# Altium PCB Copy of Main_board_4.PcbDoc (part 1 of 2)
Units mm, origin at the board's own origin, x right, y up, seen from the top; angles counter-clockwise.
Board outline 130 x 70 mm, 4 copper layers (Top Layer, Int1 (GND), Int2 (PWR), Bottom Layer), stack 1.577 mm thick; 69 components, 62 nets, 244 pads, 36 vias.
Unrouted connection lines stored in the file: 9.
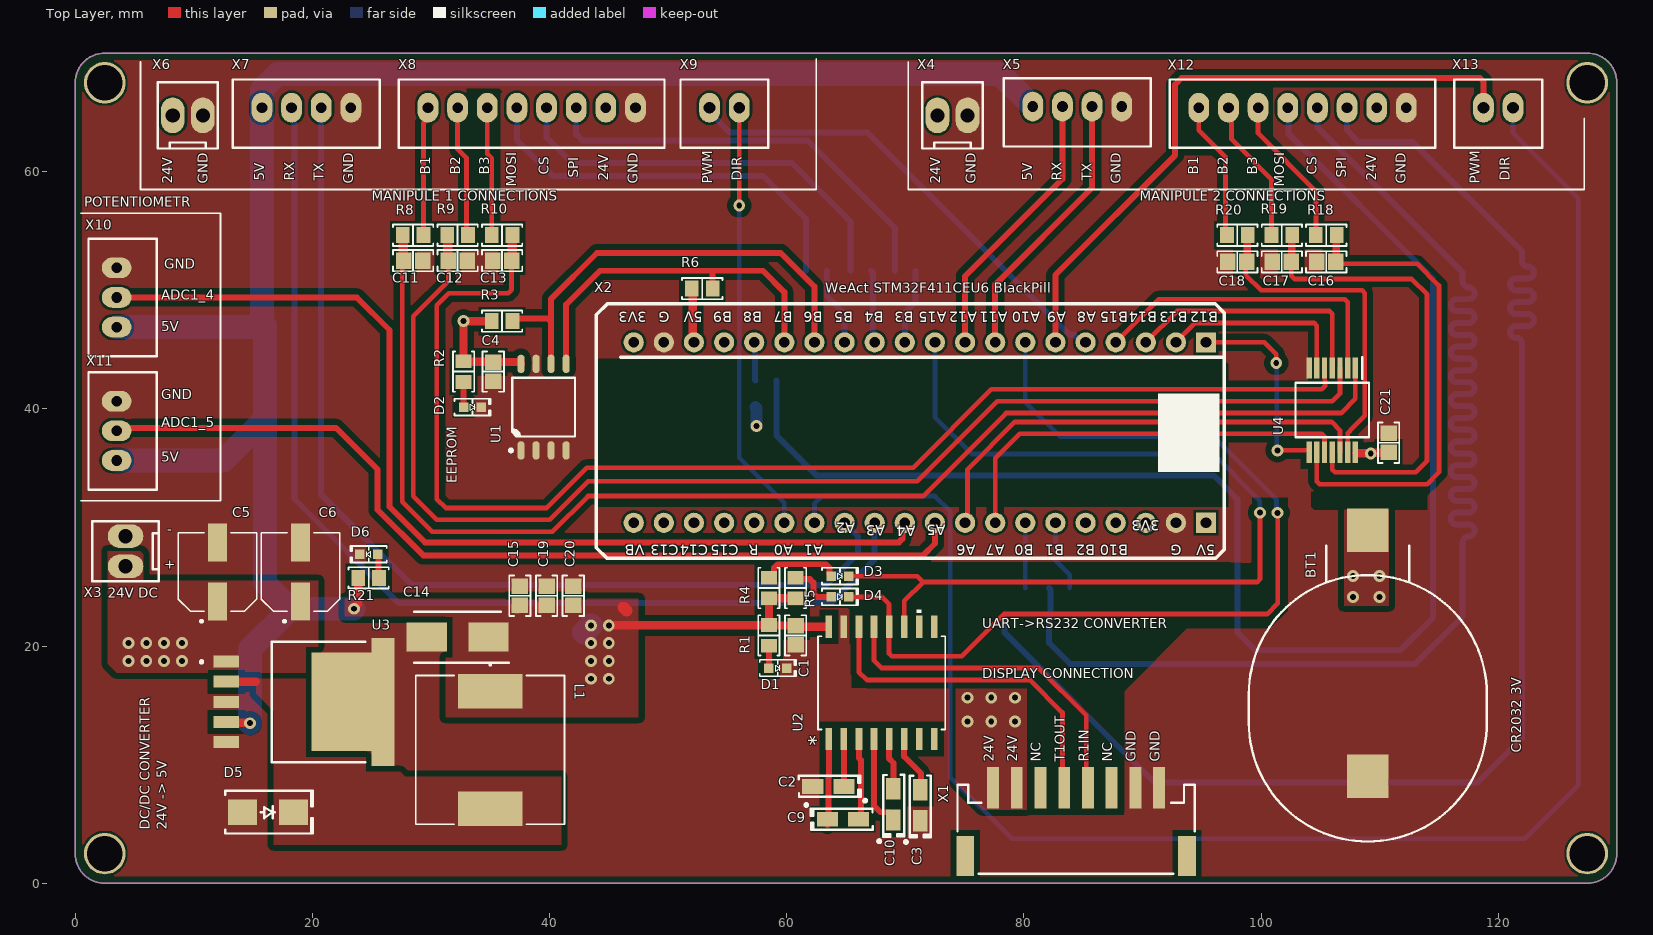
[diagram p0: Top Layer view]
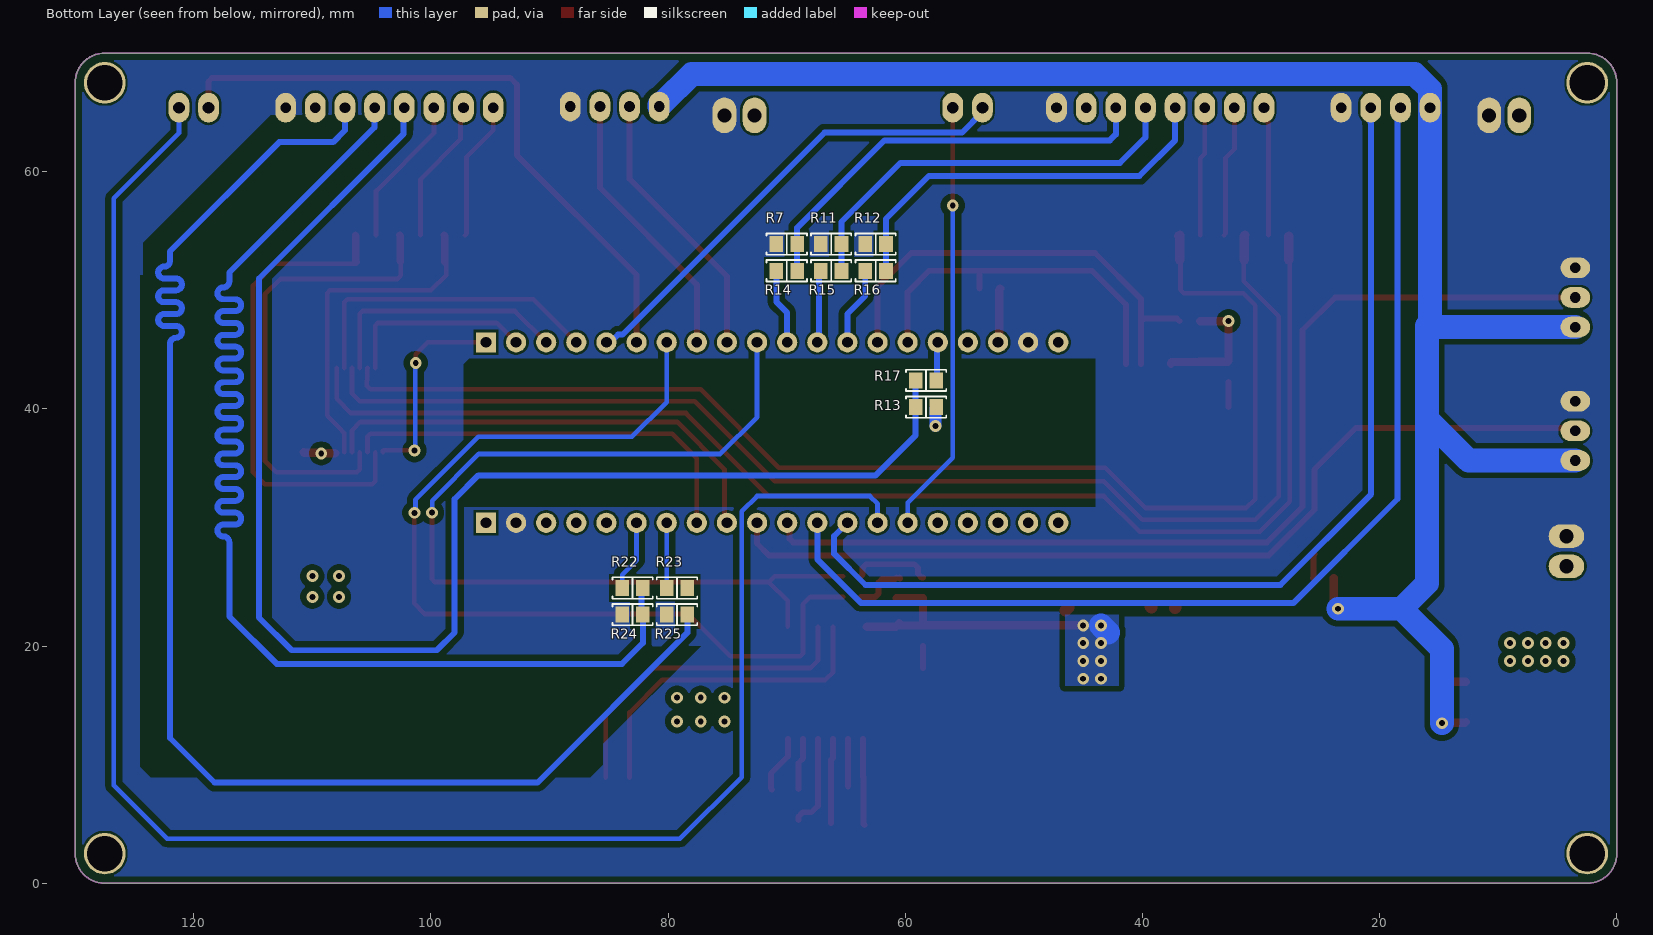
[diagram p1: Bottom Layer view, seen from below]
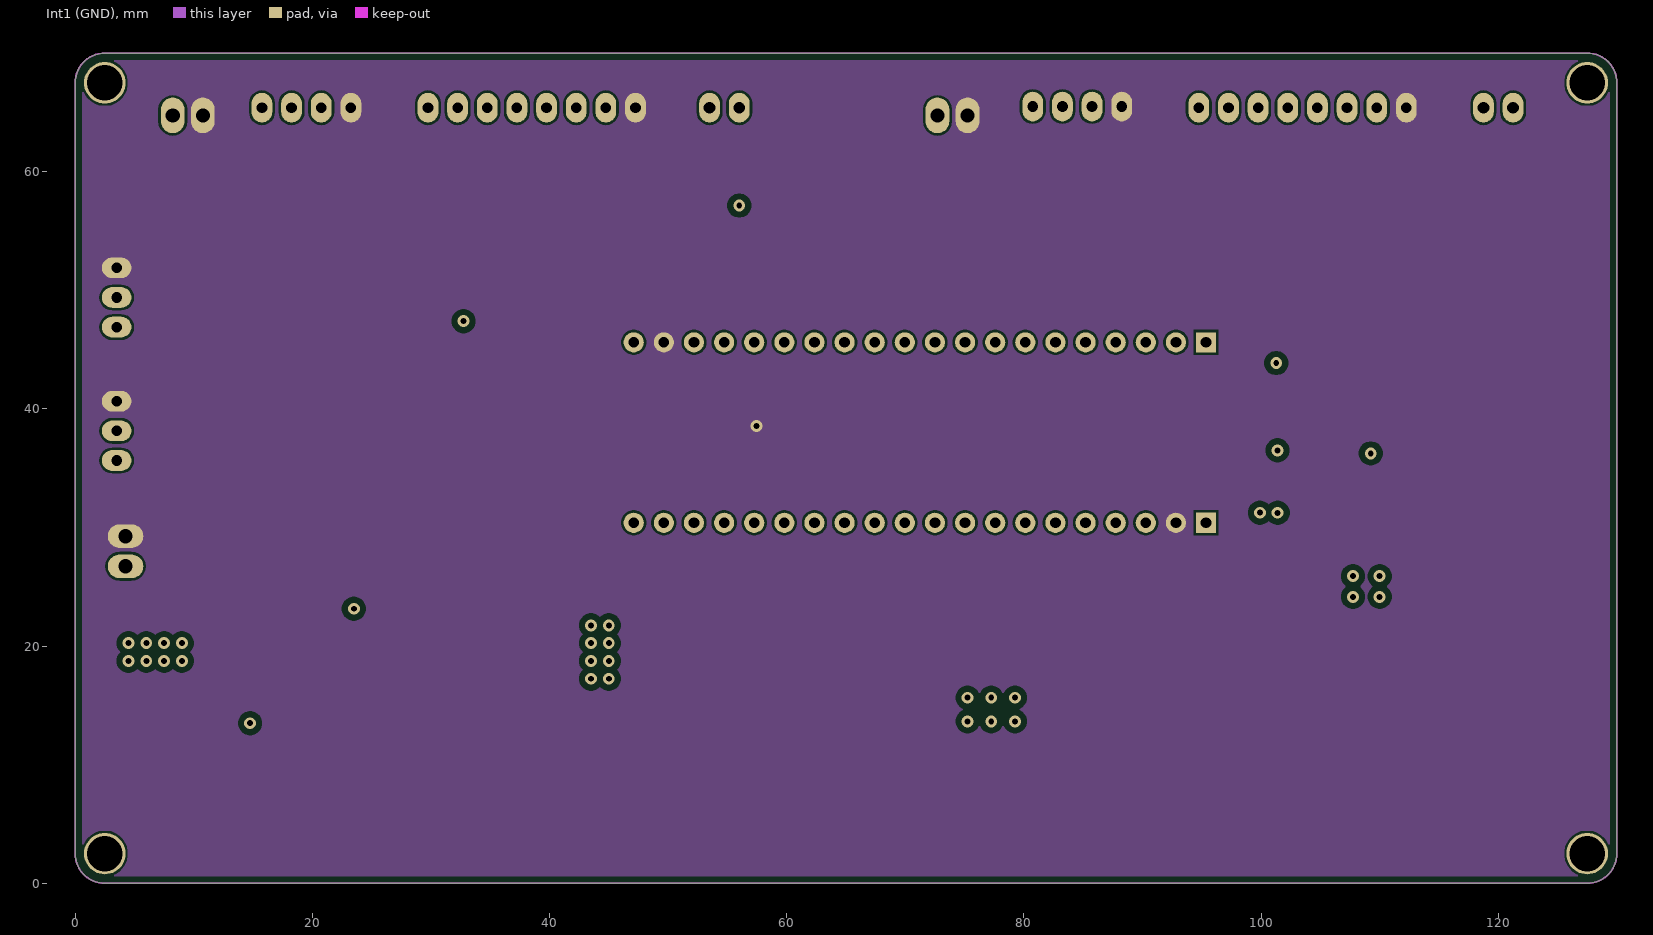
[diagram p2: Int1 (GND)]
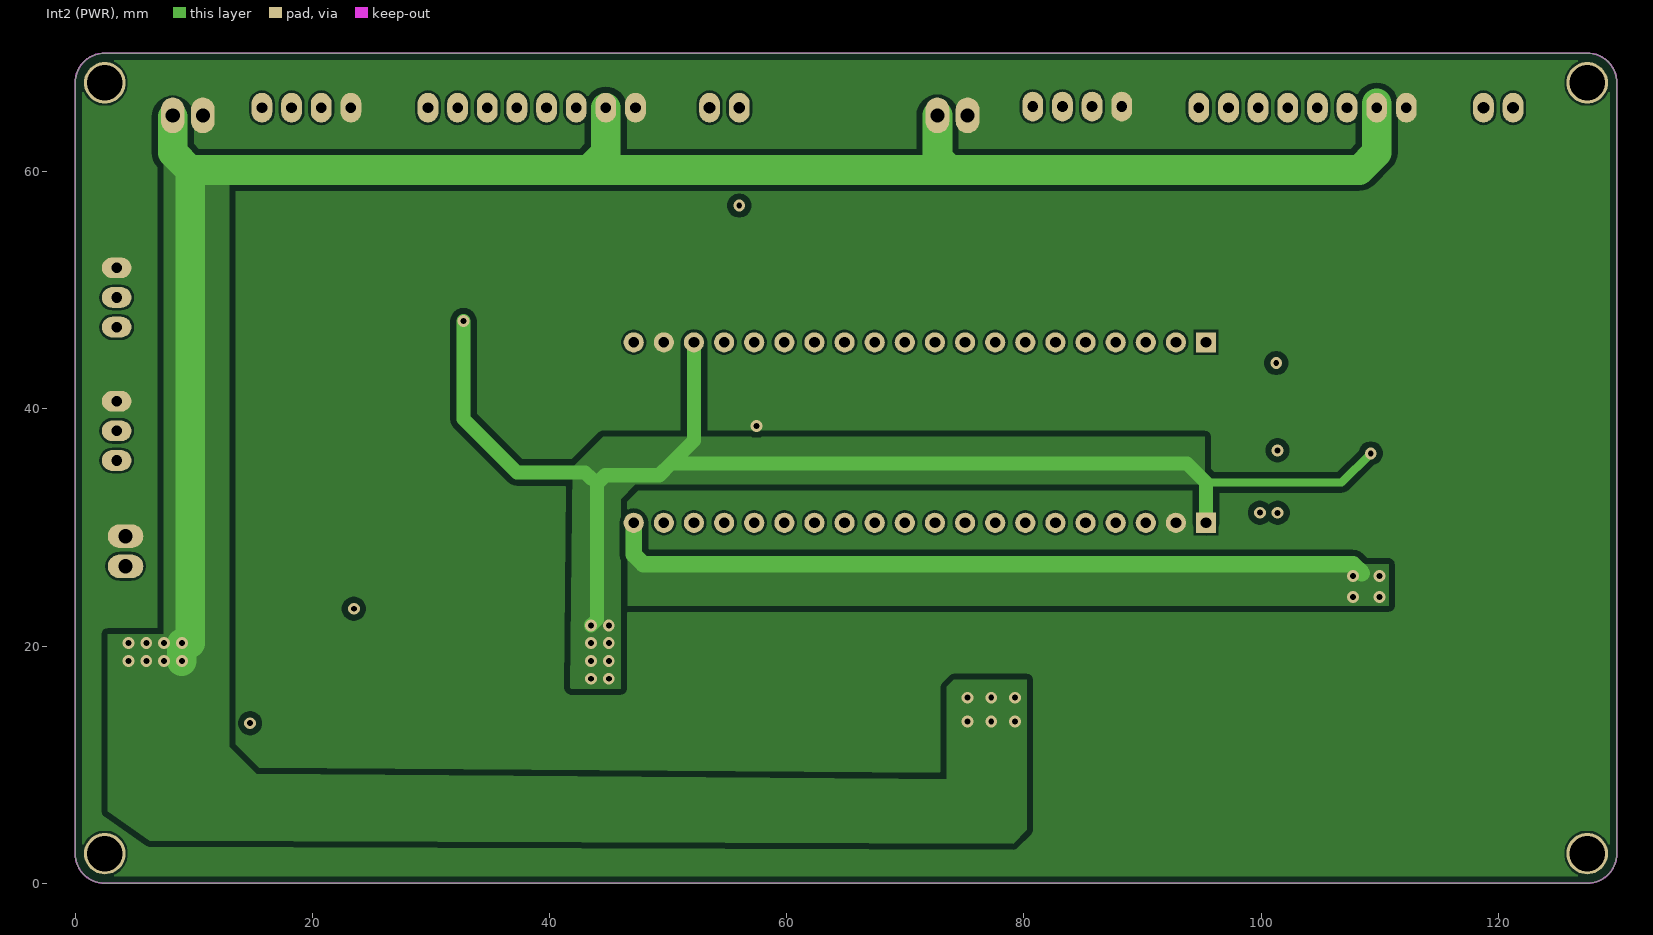
[diagram p3: Int2 (PWR)]

## Layer stack, top to bottom
Top Solder: solder mask 0.0254, SM-002, Dk 4
Top Layer: signal copper 0.035
Dielectric 2: prepreg 0.0711, PP-006, Dk 4.1
Int1 (GND): signal copper 0.035
Dielectric 1: core 1.295, Core-039, Dk 4.8
Int2 (PWR): signal copper 0.035
Dielectric 3: prepreg 0.0711, PP-006, Dk 4.1
Bottom Layer: signal copper 0.035
Bottom Solder: solder mask 0.0254, SM-002, Dk 4

## Board outline
0,2.5 0,67.5 cw(c2.5,67.5) 2.5,70 127.5,70 cw(c127.5,67.5) 130,67.5 130,2.5 cw(c127.5,2.5) 127.5,0 2.5,0 cw(c2.5,2.5)

## Design rules (kind name [scope] priority, off if disabled: settings)
BoardOutlineClearance [All] p1: gap=0.25 ignorepadtopadclearanceinfootprint=FALSE
Clearance Clearance_MultiLayerPad [OnLayer('Multi-Layer') and IsPad] p1: gap=0.2 ignorepadtopadclearanceinfootprint=FALSE except(0: Arc-Hole Track-Hole SMDPad-Hole THPad-Hole Via-Hole Fill-Hole Poly-Hole Region-Hole Text-Hole)
Clearance Clearance_Polygon [InPolygon] p2: gap=0.5 ignorepadtopadclearanceinfootprint=FALSE except(0: Arc-Hole Track-Hole SMDPad-Hole THPad-Hole Via-Hole Fill-Hole Poly-Hole Region-Hole Text-Hole; 0.3: Arc-THPad Arc-Via Arc-Text Track-THPad Track-Via Track-Text SMDPad-THPad SMDPad-Via SMDPad-Text THPad-THPad THPad-Via THPad-Text Via-Via Via-Text Fill-Text Poly-Text Region-Text Text-Text)
Clearance [All] p3: gap=0.1 ignorepadtopadclearanceinfootprint=FALSE except(0: Arc-Hole Track-Hole SMDPad-Hole THPad-Hole Via-Hole Fill-Hole Poly-Hole Region-Hole Text-Hole)
ComponentClearance [All] p1: gap=0.2 collisioncheckmode=3 verticalgap=0.2 showdistances=FALSE
DiffPairsRouting [All] p1: maxlimit=0.5 minlimit=0.1 mostfreqgap=0.19 toplayer_maxgap=0.3 toplayer_minwidth=0.1 toplayer_maxwidth=0.6 toplayer_prefwidth=0.18 midlayer1_prefgap=0.15 midlayer1_minwidth=0.1 midlayer1_maxwidth=0.5 midlayer1_prefwidth=0.15 midlayer2_prefgap=0.15 midlayer2_minwidth=0.1 midlayer2_maxwidth=0.5 midlayer2_prefwidth=0.15 bottomlayer_maxgap=0.3 bottomlayer_minwidth=0.1 bottomlayer_maxwidth=0.6 bottomlayer_prefwidth=0.18 maxuncoupledlength=12.7
Height [All] p1: minheight=0 maxheight=50 prefheight=12.7
HoleSize [All] p1: absolutevalues=TRUE maxlimit=10 minlimit=0.3 maxpercent=80.000 minpercent=20.000
HoleToHoleClearance [All] p1: gap=0.3 allowstackedmicrovias=TRUE
MinimumSolderMaskSliver [All] p1: minsoldermaskwidth=0.05
PlaneClearance [All] p1: clearance=0.5
PlaneConnect [All] p1: planeconnectstyle=Relief reliefexpansion=0.5 reliefentries=4 reliefconductorwidth=0.2 reliefairgap=0.2
PolygonConnect PolygonConnect_PadGND [InNet('GND') and IsPad] p1: connectstyle=Direct reliefconductorwidth=0.2 reliefentries=4 polygonreliefangle="90 Angle" airgapwidth=0.2
PolygonConnect PolygonConnect_Via [IsVia] p2: connectstyle=Direct reliefconductorwidth=0.254 reliefentries=4 polygonreliefangle="90 Angle" airgapwidth=0.254
PolygonConnect [All] p3: connectstyle=Direct reliefconductorwidth=0.2 reliefentries=4 polygonreliefangle="90 Angle" airgapwidth=0.2
RoutingVias [All] p1: holewidth=0.2 width=0.4 viastyle="Through Hole" minholewidth=0.2 minwidth=0.4 maxholewidth=0.5 maxwidth=1.2
SilkToSolderMaskClearance [IsPad] p1: minsilkscreentomaskgap=0.05 clearancetoexposedcopper=TRUE
SolderMaskExpansion [All] p1: expansion=0.075 istentingtop=FALSE
Width [All] p1: maxlimit=10 minlimit=0.1 preferedwidth=0.1
21 further rules are at their usual default settings.

## Classes and differential pairs
component class Main: BT1 C1 C2 C3 C4 C5 C6 C9 C10 C11 C13 C15 C16 C17 C20 C21 D1 D2 D3 D6 L1 R1 R2 R3 R4 R5 R6 R7 R8 R9 R10 R11 R14 R15 R16 R17 R18 R19 R20 R21 R22 R23 R24 R25 U1 U2 U3 U4 X1 X2 X3 X4 X5 X6 X7 X8 X9 X10 X11 X12 X13

## Components (designator, comment, footprint, x,y, rotation, side; value= is the part's Value field where it differs from the comment)
BT1 "1070TR" 1070TR 109,16.65 r270 top
C1 "0.1µF" "CAP 0805_2012" 60.75,20.9 r90 top
C2 "0.47µF" "CAP POL 1206_3216" 63.515,8.165 r180 top
C3 "0.47µF" "CAP POL 1206_3216" 71.25,6.59 r90 top
C4 "0.1µF" "CAP 0805_2012" 35.25,43.15 r90 top
C5 "EEHZA1V470P" CAP_EEHZA1V470P 12,26.25 r90 top value="47 uF 35V"
C6 "EEHZA1V470P" CAP_EEHZA1V470P 19,26.25 r90 top value="47 uF 35V"
C9 "0.1µF" "CAP POL 1206_3216" 64.75,5.4 r0 top
C10 "0.47µF" "CAP POL 1206_3216" 69,6.65 r90 top
C11 "0.1µF" "CAP 0805_2012" 28.5,52.5 r180 top
C12 "0.1µF" "CAP 0805_2012" 32.25,52.5 r180 top
C13 "0.1µF" "CAP 0805_2012" 36,52.5 r0 top
C14 "293D227X9010E2TE3" CAPPM7343X430N 32.25,20.75 r180 top
C15 "10µF" "CAP 0805_2012" 37.5,24.25 r90 top
C16 "0.1µF" "CAP 0805_2012" 105.5,52.4 r0 top
C17 "0.1µF" "CAP 0805_2012" 101.75,52.4 r0 top
C18 "0.1µF" "CAP 0805_2012" 98,52.4 r0 top
C19 "10µF" "CAP 0805_2012" 39.75,24.25 r90 top
C20 "0.47µF" "CAP 0805_2012" 42,24.25 r270 top
C21 "0.1µF" "CAP 0805_2012" 110.75,37.15 r270 top
D1 "Red" "LED 0603_1608 RED" 59.25,18.15 r0 top
D2 "Red" "LED 0603_1608 RED" 33.5,40.15 r0 top
D3 "Red" "LED 0603_1608 RED" 64.5,25.9 r0 top
D4 "Red" "LED 0603_1608 RED" 64.5,24.15 r0 top
D5 "SS26" "DO214AA SMB" 16.25,6 r0 top
D6 "Red" "LED 0603_1608 RED" 24.75,27.75 r180 top
L1 "CDRH127/LDNP-820MC" IND_CDRH127/LDNP-470MC_SUM 35,11.25 r270 top
R1 "1 kOhms" "RES 0805_2012" 58.5,20.9 r90 top
R2 "1 kOhms" "RES 0805_2012" 32.75,43.15 r90 top
R3 "10 kOhms" "RES 0805_2012" 36,47.4 r180 top
R4 "1 kOhms" "RES 0805_2012" 58.5,24.9 r270 top
R5 "1 kOhms" "RES 0805_2012" 60.75,24.9 r270 top
R6 "10 kOhms" "RES 0805_2012" 52.875,50.15 r180 top
R7 "1 kOhms" "RES 0805_2012" 70,53.9 r0 bottom
R8 "10 kOhms" "RES 0805_2012" 28.5,54.65 r0 top
R9 "10 kOhms" "RES 0805_2012" 32.25,54.65 r0 top
R10 "10 kOhms" "RES 0805_2012" 36,54.65 r180 top
R11 "1 kOhms" "RES 0805_2012" 66.25,53.9 r0 bottom
R12 "1 kOhms" "RES 0805_2012" 62.5,53.9 r0 bottom
R13 "1 kOhms" "RES 0805_2012" 58.25,40.15 r180 bottom
R14 "1 kOhms" "RES 0805_2012" 70,51.65 r180 bottom
R15 "1 kOhms" "RES 0805_2012" 66.25,51.65 r180 bottom
R16 "1 kOhms" "RES 0805_2012" 62.5,51.65 r180 bottom
R17 "1 kOhms" "RES 0805_2012" 58.25,42.4 r0 bottom
R18 "10 kOhms" "RES 0805_2012" 105.5,54.65 r180 top
R19 "10 kOhms" "RES 0805_2012" 101.75,54.65 r180 top
R20 "10 kOhms" "RES 0805_2012" 98,54.65 r180 top
R21 "1 kOhms" "RES 0805_2012" 24.75,25.75 r180 top
R22 "1 kOhms" "RES 0805_2012" 83,24.9 r0 bottom
R23 "1 kOhms" "RES 0805_2012" 79.25,24.9 r0 bottom
R24 "1 kOhms" "RES 0805_2012" 83,22.65 r0 bottom
R25 "1 kOhms" "RES 0805_2012" 79.25,22.65 r0 bottom
U1 "AT24C512C-SHD-T" "MICROCHIP SOIC-8 208MIL WIDE" 39.5,40.15 r90 top
U2 "MAX3232CDW" DW16 68,16.9 r90 top
U3 "LM2596SX-5.0_NOPB" KTT0005B 25.211,15.3 r180 top
U4 "SN74HCT14DBR" SOP65P780X200-14N 106,39.9 r270 top
X1 "S8B-PH-SM4-TB(LF)(SN)" "JST S8B-PH-SM4-TB" 84.4,3.8 r180 top
X2 "STM32F411CU6_WeAct" "STM32F4x1CxU6 WeActStudio" 96.882,48.866 r180 top
X3 "0022272021" "MOLEX KK 0022272021" 4.25,28 r90 top
X4 "0022272021" "MOLEX KK 0022272021" 73.98,64.75 r0 top
X5 "B4B-XH-A(LF)(SN)" "JST XH B4B-XH-A" 84.5,65.5 r0 top
X6 "0022272021" "MOLEX KK 0022272021" 9.5,64.75 r0 top
X7 "B4B-XH-A(LF)(SN)" "JST XH B4B-XH-A" 19.5,65.4 r0 top
X8 "B8B-XH-A(LF)(SN)" "JST XH B8B-XH-A" 38.5,65.4 r0 top
X9 "B2B-XH-A(LF)(SN)" "JST XH B2B-XH-A" 54.75,65.4 r0 top
X10 "B3B-XH-A(LF)(SN)" "JST XH B3B-XH-A" 3.5,49.4 r90 top
X11 "B3B-XH-A(LF)(SN)" "JST XH B3B-XH-A" 3.5,38.15 r90 top
X12 "B8B-XH-A(LF)(SN)" "JST XH B8B-XH-A" 103.5,65.4 r0 top
X13 "B2B-XH-A(LF)(SN)" "JST XH B2B-XH-A" 120,65.4 r0 top

## Footprints (in the part's own frame and the unit in brackets; to place one, negate y for a bottom-side part, rotate by r counter-clockwise, add the part's x,y. Pads: shape width x height; smd on the part's side, far side on the other; paste and mask are expansions set on the pad)
1070TR [mm]
  rect 3.65x3.51 smd: 1(-13.13,0) 2(7.62,0)
  silkscreen extent -11.8,-10.03 13.13,10.03
"CAP 0805_2012" [mm] "Chip Capacitor, 2-Leads, Body 2.00x1.20mm, IPC Medium Density"
  rect 1.3x1.4 smd: 1(-0.8,0) 2(0.8,0)
  silkscreen extent -1.7,-0.9 1.7,0.9, body extent -1,-0.64 1,0.64, height 1.26
"CAP POL 1206_3216" [mm] "Molded Capacitor, 2-Leads, Body 3.20x1.6mm, IPC Medium Density"
  rect 1.8x1.23 smd: 1(-1.31,0) 2(1.31,0)
  silkscreen extent -3.22,-0.9 2.5,1.32, body extent -1.72,-0.85 1.71,0.85, height 1.7
CAP_EEHZA1V470P [mm]
  rect 3.2x1.6 smd: 1(-2.5,0) 2(2.5,0)
  silkscreen extent -4.25,-3.3 3.3,3.3, body extent -3.65,-3.3 3.65,3.3, height 5.8
CAPPM7343X430N [mm]
  rect 3.4x2.45 smd: 1(-2.6,0) 2(2.6,0)
  silkscreen extent -4.3,-2.15 3.65,2.15, body extent -3.59,-2.35 3.6,2.35, height 4.12
"DO214AA SMB" [mm] "Molded Diode, 2-Leads, Body 4.31x3.62mm, IPC Medium Density"
  rect 2.45x2.15 smd: 1(-2.15,0) 2(2.15,0)
  silkscreen extent -3.6,-1.8 3.8,1.8, body extent -2.6,-1.8 2.6,1.8, height 2.4
DW16 [mm]
  rect 1.874x0.558 smd paste+0 mask+0: 1(-4.734,4.445) 2(-4.734,3.175) 3(-4.734,1.905) 4(-4.734,0.635) 5(-4.734,-0.635) 6(-4.734,-1.905) 7(-4.734,-3.175) 8(-4.734,-4.445) 9(4.734,-4.445) 10(4.734,-3.175) 11(4.734,-1.905) 12(4.734,-0.635) 13(4.734,0.635) 14(4.734,1.905) 15(4.734,3.175) 16(4.734,4.445)
  silkscreen extent -3.92,-5.37 6.18,5.37, body extent -5.32,-5.25 5.32,5.25, height 2.64
IND_CDRH127/LDNP-470MC_SUM [mil]
  rect 114x213 smd: 1(-195,0) 2(195,0)
  silkscreen extent -285,-247 247,247, body extent -236,-236 236,236, height 315
"JST S8B-PH-SM4-TB" [mm] "JST PH Series 2mm pitch, side entry connector"
  rect 1x3.5 smd: 1(-7,-4.25) 2(-5,-4.25) 3(-3,-4.25) 4(-1,-4.25) 5(1,-4.25) 6(3,-4.25) 7(5,-4.25) 8(7,-4.25)
  rect 1.5x3.4 smd: M(-9.35,1.5) M(9.35,1.5)
  silkscreen extent -10,-4.5 10,3, body extent -9.95,-5.6 9.95,3.01, height 5.6
"JST XH B2B-XH-A" [mm]
  oval 1.75x2.5 hole 1: 1(-1.25,0) 2(1.25,0)
  silkscreen extent -3.7,-3.38 3.7,2.38, body extent -3.7,-3.38 3.7,2.38, height 7
"JST XH B3B-XH-A" [mm]
  oval 1.75x2.5 hole 0.9: 1(-2.5,0) 2(0,0) 3(2.5,0)
  silkscreen extent -4.95,-3.38 4.95,2.38, body extent -4.95,-3.38 4.95,2.38, height 7
"JST XH B4B-XH-A" [mm]
  oval 1.75x2.5 hole 0.9: 1(-3.75,0) 2(-1.25,0) 3(1.25,0) 4(3.75,0)
  silkscreen extent -6.2,-3.38 6.2,2.38, body extent -6.2,-3.38 6.2,2.38, height 7
"JST XH B8B-XH-A" [mm]
  oval 1.75x2.5 hole 0.9: 1(-8.75,0) 2(-6.25,0) 3(-3.75,0) 4(-1.25,0) 5(1.25,0) 6(3.75,0) 7(6.25,0) 8(8.75,0)
  silkscreen extent -11.2,-3.38 11.2,2.38, body extent -11.2,-3.38 11.2,2.38, height 7
KTT0005B [mm]
  rect 2.16x1.02 smd: 1(12.461,-3.4) 2(12.461,-1.7) 3(12.461,0) 4(12.461,1.7) 5(12.461,3.4)
  rect 6.99x8.33 smd: 6(1.786,0)
  rect 1.91x1.235 smd: 7(-0.754,4.782) 8(-0.754,-4.782)
  silkscreen extent 0.76,-5.08 14.68,5.08, body extent -1.11,-5.08 13.24,5.08, height 4.72
"LED 0603_1608 RED" [mm] "Chip Diode, 2-Leads, Body 1.60x0.80mm, IPC Medium Density"
  rect 0.8x0.8 smd: 1(-0.75,0) 2(0.75,0)
  silkscreen extent -1.52,-0.7 1.52,0.7, body extent -0.8,-0.4 0.8,0.4, height 0.53
"MICROCHIP SOIC-8 208MIL WIDE" [mm] "SOIC, 8-Leads, Body 5.28x5.28mm, Pitch 1.27mm, IPC Medium Density"
  oval 1.55x0.6 smd: 1(-3.65,1.905) 2(-3.65,0.635) 3(-3.65,-0.635) 4(-3.65,-1.905) 5(3.65,-1.905) 6(3.65,-0.635) 7(3.65,0.635) 8(3.65,1.905)
  silkscreen extent -3.77,-2.65 2.47,2.88, body extent -4.01,-2.64 4.01,2.64, height 1.5
"MOLEX KK 0022272021" [mm]
  oval 2x3 hole 1.2: 1(-1.27,0) 2(1.27,0)
  silkscreen extent -2.54,-2.79 2.54,2.79, body extent -2.54,-2.9 2.54,2.9, height 11.7
"RES 0805_2012" [mm] "Chip Resistor, 2-Leads, Body 2.00x1.25mm, IPC Medium Density"
  rect 1.15x1.35 smd: 1(-0.875,0) 2(0.875,0)
  silkscreen extent -1.7,-0.9 1.7,0.9, body extent -1,-0.62 1,0.63, height 0.6
SOP65P780X200-14N [mm]
  rect 1.8x0.45 smd: 1(-3.55,1.95) 2(-3.55,1.3) 3(-3.55,0.65) 4(-3.55,0) 5(-3.55,-0.65) 6(-3.55,-1.3) 7(-3.55,-1.95) 8(3.55,-1.95) 9(3.55,-1.3) 10(3.55,-0.65) 11(3.55,0) 12(3.55,0.65) 13(3.55,1.3) 14(3.55,1.95)
  silkscreen extent -4.45,-3.1 2.3,3.1, body extent -3.9,-3.1 3.9,3.1, height 1.9
"STM32F4x1CxU6 WeActStudio" [mm]
  rect 1.7x1.7 hole 0.9: 1(1.522,3.251) 40(1.522,18.466)
  round 1.7 hole 0.9: 2(4.062,3.251) 3(6.602,3.251) 4(9.142,3.251) 5(11.682,3.251) 6(14.222,3.251) 7(16.762,3.251) 8(19.302,3.251) 9(21.842,3.251) 10(24.382,3.251) 11(26.922,3.251) 12(29.462,3.251) 13(32.002,3.251) 14(34.542,3.251) 15(37.082,3.251) 16(39.622,3.251) 17(42.162,3.251) 18(44.702,3.251) 19(47.242,3.251) 20(49.782,3.251) 21(49.782,18.466) 22(47.242,18.466) 23(44.702,18.466) 24(42.162,18.466) 25(39.622,18.466) 26(37.082,18.466) 27(34.542,18.466) 28(32.002,18.466) 29(29.462,18.466) 30(26.922,18.466) 31(24.382,18.466) 32(21.842,18.466) 33(19.302,18.466) 34(16.762,18.466) 35(14.222,18.466) 36(11.682,18.466) 37(9.142,18.466) 38(6.602,18.466) 39(4.062,18.466)
  silkscreen extent 0,0 52.93,21.46, body extent 0,2 51.3,19.72, height 8.5

## Part data
BT1: "Battery", Manufacturer_Name="Keystone Electronics", Mouser Part Number=534-1070TR, Datasheet Link=https://www.keyelco.com/product-pdf.cfm?p=14018, Height=6.22mm, Manufacturer_Part_Number=1070TR, Mouser Price/Stock=https://www.mouser.co.uk/ProductDetail/Keystone-Electronics/1070TR?qs=76dmnhCH%2FMN2NfD64M7eLg%3D%3D
C1 C4 C11 C12 C13 C16 C17 C18 C21: library part C0805C104K9RACAUTO, "SMD AUTO X7R, CERAMIC, 0.1 UF, 1", Device Package="0805 (2012 Metric)", Manufacturer=KEMET, Operating Temperature="-55°C ~ 125°C", Ratings=AEC-Q200, Supplier Part Number 1=399-C0805C104K9RACAUTOCT-ND, Temperature Coefficient=X7R, Tolerance=±10%, Voltage - Rated=6.3V, Applications="Automotive, Bypass, Decoupling", Capacitance=0.1µF, ComponentLink1Description=Datasheet, ComponentLink1URL=https://api.kemet.com/component-edge/download/datasheet/C0805C104K9RACAUTO.pdf, ComponentLink2Description="DigiKey Link", ComponentLink2URL=http://digikey.com/product-detail/en/kemet/C0805C104K9RACAUTO/399-C0805C104K9RACAUTOCT-ND/10232873, LastUpdated="02.09.2020 01:04:08", Lifecycle Status=Active, Minimum Order=1, Mounting Type="Surface Mount, MLCC", Package / Case="0805 (2012 Metric)", Packaging=TapeAndReel, Part Number=C0805C104K9RACAUTO, Part Status=Active, PartId=17729, Price=0.05, Series="SMD Auto X7R", Size / Dimension="0.079\" L x 0.049\" W (2.00mm x 1.25mm)", Supplier 1=DigiKey, Thickness (Max)="0.035\" (0.88mm)"
C2 C3 C10: library part 293D474X9035A2TE3, "CAP TANT 0.47UF 10% 35V 1206", Device Package="1206 (3216 Metric)", ESR (Equivalent Series Resistance)=10Ohm, Manufacturer="Vishay Sprague", Manufacturer Size Code=A, Operating Temperature="-55°C ~ 125°C", Supplier Part Number 1=718-1808-1-ND, Tolerance=±10%, Voltage - Rated=35V, Capacitance=0.47µF, ComponentLink1Description=Datasheet, ComponentLink1URL=http://www.vishay.com/docs/40002/293d.pdf, ComponentLink2Description="DigiKey Link", ComponentLink2URL=http://digikey.com/product-detail/en/vishay-sprague/293D474X9035A2TE3/718-1808-1-ND/2259950, Features="General Purpose", Height - Seated (Max)="0.071\" (1.80mm)", LastUpdated="02.09.2020 01:15:57", Lifecycle Status=Active, Minimum Order=1, Mounting Type="Surface Mount", Package / Case="1206 (3216 Metric)", Packaging=TapeAndReel, Part Number=293D474X9035A2TE3, Part Status=Active, PartId=592, Price=0.12, Series="TANTAMOUNT®, 293D", Size / Dimension="0.126\" L x 0.063\" W (3.20mm x 1.60mm)", Supplier 1=DigiKey, Type=Molded
C5 C6: "CAP ALUM POLY HYB 47UF 35V SMD", Package=None, Availability=Unavailable, MF="{'manufacturer': u'Panasonic Electronic'}", MP=EEHZA1V470P, Price=None
C9: library part 293D104X0035A2TE3, "CAP TANT 0.1UF 20% 35V 1206", Device Package="1206 (3216 Metric)", ESR (Equivalent Series Resistance)=20Ohm, Manufacturer="Vishay Sprague", Manufacturer Size Code=A, Operating Temperature="-55°C ~ 125°C", Supplier Part Number 1=718-293D104X0035A2TE3CT-ND, Tolerance=±20%, Voltage - Rated=35V, Capacitance=0.1µF, ComponentLink1Description=Datasheet, ComponentLink1URL=http://www.vishay.com/docs/40002/293d.pdf, ComponentLink2Description="DigiKey Link", ComponentLink2URL=http://digikey.com/product-detail/en/vishay-sprague/293D104X0035A2TE3/718-293D104X0035A2TE3CT-ND/10506968, Features="General Purpose", Height - Seated (Max)="0.071\" (1.80mm)", LastUpdated="02.09.2020 01:15:53", Lifecycle Status=Active, Minimum Order=1, Mounting Type="Surface Mount", Package / Case="1206 (3216 Metric)", Packaging=TapeAndReel, Part Number=293D104X0035A2TE3, Part Status=Active, PartId=2092, Price=0.09, Series="TANTAMOUNT®, 293D", Size / Dimension="0.126\" L x 0.063\" W (3.20mm x 1.60mm)", Supplier 1=DigiKey, Type=Molded
C14: "Tantalum Capacitors - Solid SMD 220uF 10volts 10% E case Molded", Manufacturer_Name=Vishay, Mouser Part Number="220uF 10v", Datasheet Link=http://www.vishay.com/docs/40002/293d.pdf, Height=4.3mm, Manufacturer_Part_Number=293D227X9010E2TE3
C15 C19: library part GRM21BR61H106KE43L, "0805 (2012MM) X5R (EIA) 50VDC 10", Device Package="0805 (2012 Metric)", Manufacturer="Murata Electronics", Operating Temperature="-55°C ~ 85°C", Supplier Part Number 1=490-18663-1-ND, Temperature Coefficient=X5R, Tolerance=±10%, Voltage - Rated=50V, Applications="General Purpose", Capacitance=10µF, ComponentLink1Description=Datasheet, ComponentLink1URL=https://search.murata.co.jp/Ceramy/image/img/A01X/G101/ENG/GRM21BR61H106KE43-01A.pdf, ComponentLink2Description="DigiKey Link", ComponentLink2URL=http://digikey.com/product-detail/en/murata-electronics/GRM21BR61H106KE43L/490-18663-1-ND/10326328, LastUpdated="02.09.2020 01:04:31", Lifecycle Status=Active, Minimum Order=1, Mounting Type="Surface Mount, MLCC", Package / Case="0805 (2012 Metric)", Packaging=TapeAndReel, Part Number=GRM21BR61H106KE43L, Part Status=Active, PartId=8559, Price=0.10, Series=GRM, Size / Dimension="0.079\" L x 0.049\" W (2.00mm x 1.25mm)", Supplier 1=DigiKey, Thickness (Max)="0.057\" (1.45mm)"
C20: library part GCM21BR71H474KA55L, "CAP CER 0.47UF 50V X7R 0805", Device Package="0805 (2012 Metric)", Manufacturer="Murata Electronics", Operating Temperature="-55°C ~ 125°C", Ratings=AEC-Q200, Supplier Part Number 1=490-4788-1-ND, Temperature Coefficient=X7R, Tolerance=±10%, Voltage - Rated=50V, Applications=Automotive, Capacitance=0.47µF, ComponentLink1Description=Datasheet, ComponentLink1URL=https://www.murata.com/~/media/webrenewal/support/library/catalog/products/capacitor/mlcc/c03e.ashx?la=en-us, ComponentLink2Description="DigiKey Link", ComponentLink2URL=http://digikey.com/product-detail/en/murata-electronics/GCM21BR71H474KA55L/490-4788-1-ND/1641707, LastUpdated="02.09.2020 01:04:31", Lifecycle Status=Active, Minimum Order=1, Mounting Type="Surface Mount, MLCC", Package / Case="0805 (2012 Metric)", Packaging=TapeAndReel, Part Number=GCM21BR71H474KA55L, Part Status=Active, PartId=8527, Price=0.08, Series=GCM, Size / Dimension="0.079\" L x 0.049\" W (2.00mm x 1.25mm)", Supplier 1=DigiKey, Thickness (Max)="0.055\" (1.40mm)"
D1 D2 D3 D4 D6: library part 19-213USRC/S259/TR8, "LED RED CLEAR 2SMD", Current - Test=25mA, Device Package="0603 (1608 Metric)", Lens Color=Colorless, Manufacturer="Everlight Electronics Co Ltd", Supplier Device Package=2-SMD, Supplier Part Number 1=1080-1583-1-ND, Voltage - Forward (Vf) (Typ)=2.1V, Color=Red, ComponentLink1Description=Datasheet, ComponentLink1URL=//media.digikey.com/pdf/Data%20Sheets/Everlight%20PDFs/19-213USRC-S259-TR8.pdf, ComponentLink2Description="DigiKey Link", ComponentLink2URL=http://digikey.com/product-detail/en/everlight-electronics-co-ltd/19-213USRC-S259-TR8/1080-1583-1-ND/8535306, Configuration=Standard, Height (Max)=0.70mm, LastUpdated="02.09.2020 01:20:56", Lens Size="1.20mm x 0.80mm", Lens Style="Rectangle with Flat Top", Lens Transparency=Clear, Lifecycle Status=Active, Minimum Order=1, Mounting Type="Surface Mount", Package / Case="0603 (1608 Metric)", Packaging=TapeAndReel, Part Number=19-213USRC/S259/TR8, Part Status=Active, PartId=415, Price=0.03, Series=-, Size / Dimension="1.60mm L x 0.80mm W", Supplier 1=DigiKey, Viewing Angle=120°, Wavelength - Peak=639nm
D5: "DIODE SCHOTTKY 60V 2A DO214AA", Current - Average Rectified (Io)=2A, Current - Reverse Leakage @ Vr="400µA @ 60V", Manufacturer="ON Semiconductor", Operating Temperature - Junction="-65°C ~ 125°C", Package / Case="DO-214AA, SMB", Supplier Device Package="DO-214AA (SMB)", Supplier Part Number 1=SS26FSCT-ND, Voltage - DC Reverse (Vr) (Max)=60V, Voltage - Forward (Vf) (Max) @ If="700mV @ 2A", ComponentLink1Description=Datasheet, ComponentLink1URL=https://www.onsemi.com/pub/Collateral/SS29-D.pdf, ComponentLink2Description="DigiKey Link", ComponentLink2URL=http://digikey.com/product-detail/en/on-semiconductor/SS26/SS26FSCT-ND/965731, Diode Type=Schottky, LastUpdated="21.05.2023 20:09:05", Lifecycle Status=Active, Minimum Order=1, Mounting Type="Surface Mount", Packaging=TapeAndReel, Part Number=SS26, Part Status=Active, PartId=1378, Price=0.09, Series=-, Speed="Fast Recovery =< 500ns, > 200mA (Io)", Supplier 1=DigiKey
L1: library part CDRH127/LDNP-470MC, "47 ÂµH Shielded - Inductor 3.25 A 78mOhm Max Nonstandard", Package="Nonstandard Sumida", Availability="In Stock", Check_prices=https://www.snapeda.com/parts/CDRH127/LDNP-470MC/Sumida+America+Components+Inc./view-part/?ref=eda, MF="Sumida America", MP=CDRH127/LDNP-470MC, Price=None, Purchase-URL=https://pricing.snapeda.com/search/part/CDRH127/LDNP-470MC/?ref=eda, SnapEDA_Link=https://www.snapeda.com/parts/CDRH127/LDNP-470MC/Sumida+America+Components+Inc./view-part/?ref=snap
R1 R2 R4 R5 R7 R11 R12 R13 R14 R15 R16 R17 R21 R22 R23 R24 R25: library part RT0805BRE071KL, "RES SMD 1K OHM 0.1% 1/8W 0805", Device Package="0805 (2012 Metric)", Manufacturer=Yageo, Operating Temperature="-55°C ~ 155°C", Power (Watts)="0.125W, 1/8W", Supplier Device Package=0805, Supplier Part Number 1=YAG2328CT-ND, Temperature Coefficient=±50ppm/°C, Tolerance=±0.1%, ComponentLink1Description=Datasheet, ComponentLink1URL=https://www.yageo.com/upload/media/product/productsearch/datasheet/rchip/PYu-RT_1-to-0.01_RoHS_L_11.pdf, ComponentLink2Description="DigiKey Link", ComponentLink2URL=http://digikey.com/product-detail/en/yageo/RT0805BRE071KL/YAG2328CT-ND/5252442, Composition="Thin Film", Height - Seated (Max)="0.024\" (0.60mm)", LastUpdated="02.09.2020 01:15:19", Lifecycle Status=Active, Minimum Order=1, Number of Terminations=2, Package / Case="0805 (2012 Metric)", Packaging=TapeAndReel, Part Number=RT0805BRE071KL, Part Status=Active, PartId=29992, Price=0.06, Resistance="1 kOhms", Series=RT, Size / Dimension="0.079\" L x 0.049\" W (2.00mm x 1.25mm)", Supplier 1=DigiKey
R3 R6 R8 R9 R10 R18 R19 R20: library part RT0805DRD0710KL, "RES SMD 10K OHM 0.5% 1/8W 0805", Device Package="0805 (2012 Metric)", Manufacturer=Yageo, Operating Temperature="-55°C ~ 155°C", Power (Watts)="0.125W, 1/8W", Supplier Device Package=0805, Supplier Part Number 1=311-2699-1-ND, Temperature Coefficient=±25ppm/°C, Tolerance=±0.5%, ComponentLink1Description=Datasheet, ComponentLink1URL=https://www.yageo.com/upload/media/product/productsearch/datasheet/rchip/PYu-RT_1-to-0.01_RoHS_L_11.pdf, ComponentLink2Description="DigiKey Link", ComponentLink2URL=http://digikey.com/product-detail/en/yageo/RT0805DRD0710KL/311-2699-1-ND/6129118, Composition="Thin Film", Height - Seated (Max)="0.024\" (0.60mm)", LastUpdated="02.09.2020 01:15:24", Lifecycle Status=Active, Minimum Order=1, Number of Terminations=2, Package / Case="0805 (2012 Metric)", Packaging=TapeAndReel, Part Number=RT0805DRD0710KL, Part Status=Active, PartId=27797, Price=0.03, Resistance="10 kOhms", Series=RT, Size / Dimension="0.079\" L x 0.049\" W (2.00mm x 1.25mm)", Supplier 1=DigiKey
U1: "IC EEPROM 512K I2C 1MHZ 8SOIC", Clock Frequency=1MHz, Manufacturer="Microchip Technology", Operating Temperature="-40°C ~ 85°C (TA)", Package / Case="8-SOIC (0.209\", 5.30mm Width)", Supplier Device Package=8-SOIC, Supplier Part Number 1=AT24C512C-SHD-TCT-ND, Voltage - Supply="2.5V ~ 5.5V", Access Time=550ns, ComponentLink1Description=Datasheet, ComponentLink1URL=http://www.microchip.com/mymicrochip/filehandler.aspx?ddocname=en590134, ComponentLink2Description="DigiKey Link", ComponentLink2URL=http://digikey.com/product-detail/en/microchip-technology/AT24C512C-SHD-T/AT24C512C-SHD-TCT-ND/3178476, LastUpdated="02.09.2020 01:23:05", Lifecycle Status=Active, Memory Format=EEPROM, Memory Interface=I²C, Memory Size="512Kb (64K x 8)", Memory Type=Non-Volatile, Minimum Order=1, Mounting Type="Surface Mount", Packaging=TapeAndReel, Part Number=AT24C512C-SHD-T, Part Status=Active, PartId=883, Price=0.91, Series=-, Supplier 1=DigiKey, Technology=EEPROM, Write Cycle Time - Word, Page=5ms
U2: "No Description Available", Mfr_Name="Texas Instruments", Copyright="Copyright (C) 2022 Ultra Librarian. All rights reserved.", Manufacturer_Part_Number=MAX3232CDW, RefDes=RefDes, Type=DEV
U3: "Integrated Circuit", Arrow Part Number=LM2596SX-5.0/NOPB, Manufacturer_Name="Texas Instruments", Mouser Part Number=926-LM2596SX-5.0NOPB, Arrow Price/Stock=https://www.arrow.com/en/products/lm2596sx-5.0nopb/texas-instruments?region=nac, Datasheet Link=http://www.ti.com/lit/gpn/lm2596, Manufacturer_Part_Number=LM2596SX-5.0/NOPB, Mouser Price/Stock=https://www.mouser.co.uk/ProductDetail/Texas-Instruments/LM2596SX-5.0-NOPB?qs=X1J7HmVL2ZGZ5T4VcWdmNw%3D%3D
U4: "Integrated Circuit", Manufacturer_Name="Texas Instruments", Mouser Part Number=595-SN74HCT14DBR, Arrow Part Number=SN74HCT14DBR, Arrow Price/Stock=https://www.arrow.com/en/products/sn74hct14dbr/texas-instruments, Datasheet Link=http://www.ti.com/lit/gpn/sn74hct14, Height=2mm, Manufacturer_Part_Number=SN74HCT14DBR, Mouser Price/Stock=https://www.mouser.co.uk/ProductDetail/Texas-Instruments/SN74HCT14DBR?qs=dQbkqP7qjaYIMikAy6u%2FSg%3D%3D
X1: "CONN HEADER SMD R/A 8POS 2MM", Current Rating (Amps)=2A, Insulation Color=Natural, Manufacturer="JST Sales America Inc.", Material Flammability Rating="UL94 V-0", Operating Temperature="-25°C ~ 85°C", Supplier Part Number 1=455-1755-1-ND, Voltage Rating=100V, ComponentLink1Description=Datasheet, ComponentLink1URL=http://www.jst-mfg.com/product/pdf/eng/ePH.pdf, ComponentLink2Description="DigiKey Link", ComponentLink2URL=http://digikey.com/product-detail/en/jst-sales-america-inc/S8B-PH-SM4-TB-LF-SN/455-1755-1-ND/926852, Connector Type=Header, Contact Finish - Mating=Tin, Contact Finish - Post=Tin, Contact Length - Mating="0.130\" (3.30mm)", Contact Material="Copper Alloy", Contact Shape=Square, Contact Type="Male Pin", Fastening Type="Detent Lock", Features="Solder Retention", Insulation Height="0.217\" (5.51mm)", Insulation Material="Polyamide (PA6T), Nylon 6T", LastUpdated="15.01.2020 03:39:20", Lifecycle Status=Active, Minimum Order=1, Mounting Type="Surface Mount, Right Angle", Number of Positions=8, Number of Positions Loaded=All, Number of Rows=1, Packaging=TapeAndReel, Part Number=S8B-PH-SM4-TB(LF)(SN), Part Status=Active, PartId=114, Pitch - Mating="0.079\" (2.00mm)", Price=0.49, Series=PH, Shrouding="Shrouded - 4 Wall", Style="Board to Cable/Wire", Supplier 1=DigiKey, Termination=Solder
X3 X4 X6: "CONN HEADER VERT 2POS 2.54MM", Insulation Color=Natural, Manufacturer=Molex, Material Flammability Rating="UL94 V-0", Supplier Part Number 1=WM4111-ND, ComponentLink1Description=Datasheet, ComponentLink1URL=https://www.molex.com/pdm_docs/sd/022272021_sd.pdf, ComponentLink2Description="DigiKey Link", ComponentLink2URL=http://digikey.com/product-detail/en/molex/0022272021/WM4111-ND/1130577, Connector Type=Header, Contact Finish - Mating=Tin, Contact Finish - Post=Tin, Contact Finish Thickness - Mating="100.0µin (2.54µm)", Contact Length - Mating="0.295\" (7.49mm)", Contact Length - Post="0.140\" (3.56mm)", Contact Material=Brass, Contact Shape=Square, Contact Type="Male Pin", Fastening Type="Friction Lock", Insulation Height="0.461\" (11.70mm)", Insulation Material="Polyamide (PA), Nylon", LastUpdated="12.01.2020 23:51:43", Lifecycle Status=Active, Minimum Order=1, Mounting Type="Through Hole", Number of Positions=2, Number of Positions Loaded=All, Number of Rows=1, Overall Contact Length="0.560\" (14.22mm)", Packaging=Bulk, Part Number=0022272021, Part Status=Active, PartId=76, Pitch - Mating="0.100\" (2.54mm)", Price=0.27, Series="KK 6410", Shrouding="Shrouded - 1 Wall", Style="Board to Cable/Wire", Supplier 1=DigiKey, Termination=Solder
X5 X7: "CONN HEADER VERT 4POS 2.5MM", Current Rating (Amps)=3A, Insulation Color=Natural, Manufacturer="JST Sales America Inc.", Material Flammability Rating="UL94 V-0", Operating Temperature="-25°C ~ 85°C", Supplier Part Number 1=455-2249-ND, Voltage Rating=250V, ComponentLink1Description=Datasheet, ComponentLink1URL=http://www.jst-mfg.com/product/pdf/eng/eXH.pdf, ComponentLink2Description="DigiKey Link", ComponentLink2URL=http://digikey.com/product-detail/en/jst-sales-america-inc/B4B-XH-A-LF-SN/455-2249-ND/1651047, Connector Type=Header, Contact Finish - Mating=Tin, Contact Finish - Post=Tin, Contact Length - Post="0.134\" (3.40mm)", Contact Material=Brass, Contact Shape=Square, Contact Type="Male Pin", Fastening Type="Detent Lock", Insulation Height="0.276\" (7.00mm)", Insulation Material="Polyamide (PA66), Nylon 6/6", LastUpdated="12.01.2020 23:46:34", Lifecycle Status=Active, Minimum Order=1, Mounting Type="Through Hole", Number of Positions=4, Number of Positions Loaded=All, Number of Rows=1, Packaging=Bulk, Part Number=B4B-XH-A(LF)(SN), Part Status=Active, PartId=69, Pitch - Mating="0.098\" (2.50mm)", Price=0.21, Series=XH, Shrouding="Shrouded - 4 Wall", Style="Board to Cable/Wire", Supplier 1=DigiKey, Termination="Press-Fit, Solder"
X8 X12: "CONN HEADER VERT 8POS 2.5MM", Current Rating (Amps)=3A, Insulation Color=Natural, Manufacturer="JST Sales America Inc.", Material Flammability Rating="UL94 V-0", Operating Temperature="-25°C ~ 85°C", Supplier Part Number 1=455-2251-ND, Voltage Rating=250V, ComponentLink1Description=Datasheet, ComponentLink1URL=http://www.jst-mfg.com/product/pdf/eng/eXH.pdf, ComponentLink2Description="DigiKey Link", ComponentLink2URL=http://digikey.com/product-detail/en/jst-sales-america-inc/B8B-XH-A-LF-SN/455-2251-ND/1651049, Connector Type=Header, Contact Finish - Mating=Tin, Contact Finish - Post=Tin, Contact Length - Post="0.134\" (3.40mm)", Contact Material=Brass, Contact Shape=Square, Contact Type="Male Pin", Fastening Type="Detent Lock", Insulation Height="0.276\" (7.00mm)", Insulation Material="Polyamide (PA66), Nylon 6/6", LastUpdated="12.01.2020 23:47:22", Lifecycle Status=Active, Minimum Order=1, Mounting Type="Through Hole", Number of Positions=8, Number of Positions Loaded=All, Number of Rows=1, Packaging=Bulk, Part Number=B8B-XH-A(LF)(SN), Part Status=Active, PartId=73, Pitch - Mating="0.098\" (2.50mm)", Price=0.36, Series=XH, Shrouding="Shrouded - 4 Wall", Style="Board to Cable/Wire", Supplier 1=DigiKey, Termination="Press-Fit, Solder"
X9 X13: "CONN HEADER VERT 2POS 2.5MM", Current Rating (Amps)=3A, Insulation Color=Natural, Manufacturer="JST Sales America Inc.", Material Flammability Rating="UL94 V-0", Operating Temperature="-25°C ~ 85°C", Supplier Part Number 1=455-2247-ND, Voltage Rating=250V, ComponentLink1Description=Datasheet, ComponentLink1URL=http://www.jst-mfg.com/product/pdf/eng/eXH.pdf, ComponentLink2Description="DigiKey Link", ComponentLink2URL=http://digikey.com/product-detail/en/jst-sales-america-inc/B2B-XH-A-LF-SN/455-2247-ND/1651045, Connector Type=Header, Contact Finish - Mating=Tin, Contact Finish - Post=Tin, Contact Length - Post="0.134\" (3.40mm)", Contact Material=Brass, Contact Shape=Square, Contact Type="Male Pin", Fastening Type="Detent Lock", Insulation Height="0.276\" (7.00mm)", Insulation Material="Polyamide (PA66), Nylon 6/6", LastUpdated="12.01.2020 23:46:08", Lifecycle Status=Active, Minimum Order=1, Mounting Type="Through Hole", Number of Positions=2, Number of Positions Loaded=All, Number of Rows=1, Packaging=Bulk, Part Number=B2B-XH-A(LF)(SN), Part Status=Active, PartId=67, Pitch - Mating="0.098\" (2.50mm)", Price=0.15, Series=XH, Shrouding="Shrouded - 4 Wall", Style="Board to Cable/Wire", Supplier 1=DigiKey, Termination="Press-Fit, Solder"
X10 X11: "CONN HEADER VERT 3POS 2.5MM", Current Rating (Amps)=3A, Insulation Color=Natural, Manufacturer="JST Sales America Inc.", Material Flammability Rating="UL94 V-0", Operating Temperature="-25°C ~ 85°C", Supplier Part Number 1=455-2248-ND, Voltage Rating=250V, ComponentLink1Description=Datasheet, ComponentLink1URL=http://www.jst-mfg.com/product/pdf/eng/eXH.pdf, ComponentLink2Description="DigiKey Link", ComponentLink2URL=http://digikey.com/product-detail/en/jst-sales-america-inc/B3B-XH-A-LF-SN/455-2248-ND/1651046, Connector Type=Header, Contact Finish - Mating=Tin, Contact Finish - Post=Tin, Contact Length - Post="0.134\" (3.40mm)", Contact Material=Brass, Contact Shape=Square, Contact Type="Male Pin", Fastening Type="Detent Lock", Insulation Height="0.276\" (7.00mm)", Insulation Material="Polyamide (PA66), Nylon 6/6", LastUpdated="12.01.2020 23:46:22", Lifecycle Status=Active, Minimum Order=1, Mounting Type="Through Hole", Number of Positions=3, Number of Positions Loaded=All, Number of Rows=1, Packaging=Bulk, Part Number=B3B-XH-A(LF)(SN), Part Status=Active, PartId=68, Pitch - Mating="0.098\" (2.50mm)", Price=0.19, Series=XH, Shrouding="Shrouded - 4 Wall", Style="Board to Cable/Wire", Supplier 1=DigiKey, Termination="Press-Fit, Solder"

## Free pads (board coordinates)
  round 3.5 hole 3: 1(2.5,2.5) 1(2.5,67.5) 1(127.5,2.5) 1(127.5,67.5)

## Via types
v1: diameter 1, hole 0.5, Top Layer to Bottom Layer, tented both sides, 36 vias

## Nets (pads, with @x,y where several pads share a name; then routed paths per layer and width w, separated by ;. In a path a pad name is that pad's centre, name@x,y a point inside that pad or via, vN(x,y) a via of type N, cw(c..) or ccw(c..) an arc to the next point about the centre after c; other vN are vias at no path point)
5V: C1.2 C4.2 C14.1 C15.1 C19.1 C20.2 C21.2 L1.1 R1.2 R2.2 R3.2 R4.2 R5.2 R6.2 R21.2 U1.8 U2.16 U3.4 U4.14 X2.18 X2.40 X5.1 X7.1 X10.1 X11.1 | length 317.5
  Top Layer w0.7: U3.4 12.8,13.55 14.7,13.55 v1(14.75,13.5) ; v1(23.5,23.15) 23.5,23.231 23.875,23.606 R21.2 ; R3.2 v1(32.75,47.4) R2.2 32.788,43.987 35.213,43.987 C4.2 37.545,43.95 37.595,43.9 U1.8 ; v1(45,21.75) R1.2@58.475,21.75 ; R6.2 52.09,50.06 52.09,45.705 X2.18 ; C1.2@60.5,21.95 C1.2@60.713,21.738 ; R5.2@60.5,23.8 R5.2@60.725,24.025 ; R5.2 R5.2@60.725,24.025 ; 63.25,21.634 60.816,21.634 C1.2 C1.2@60.713,21.738 ; U4.14@108.075,36.25 v1@109.35,36.25 ; v1(109.25,36.25) 109.3,36.3 110.7,36.3 C21.2 ; C1.2@60.713,21.738 58.538,21.738 R1.2 R4.2 R5.2@60.725,24.025
  Top Layer w1: C15.1@37.2,23.25 C15.1@37.25,23.2 ; C19.1@39.25,23.25 C19.1@39.35,23.35 ; 46.25,23.25 46.5,23
  Int2 (PWR) w0.7: 95.36,33.79 106.79,33.79 v1(109.25,36.25)
  Int2 (PWR) w1.2: v1(32.75,47.4) 32.75,39.15 37.25,34.65 43,34.65 43.5,34.15 ; v1(43.5,21.75) 44,22.25 44,33.697 44.703,34.4 49.25,34.4 50.25,35.4 ; X2.18 52.18,37.33 50.25,35.4 ; X2.40 95.36,33.79 93.75,35.4 50.25,35.4
  Bottom Layer w2: X11.1 12.5,35.65 16,39.15 ; X10.1 15.9,46.9 16,47 16,39.15 ; v1(14.75,13.5) 14.75,19.75 18.15,23.15 ; 15.75,46.9 X7.1 15.75,66.953 17.047,68.25 78,68.25 80.5,65.75 80.625,65.75 80.75,65.625 X5.1 ; v1(23.5,23.15) 18.15,23.15 ; 42.9,21.15 v1(43.5,21.75) ; 16,39.15 16,25.3 18.15,23.15
  other v1: 43.5,17.25 45,17.25 43.5,18.75 45,18.75 43.5,20.25 45,20.25
ADC1_IN4: X2.30 X10.2 | length 85.1
  Top Layer w0.5: X10.2 23.75,49.4 26.5,46.65 26.5,31.75 29.5,28.75 69.457,28.75 69.75,29.043 69.75,30.19 X2.30
ADC1_IN5: X2.31 X11.2 | length 77.7
  Top Layer w0.5: X11.2 3.739,38.389 4.782,38.389 4.793,38.4 22,38.4 25.5,34.9 25.5,31.5 29.35,27.65 71.5,27.65 72.5,28.65 X2.31
Button1_1: R8.2 X8.1 | length 10.9
  Top Layer w0.4: R8.2 29.375,64.116 29.492,64.232 29.492,65.142 X8.1
Button1_2: R9.2 X8.2 | length 11.1
  Top Layer w0.4: X8.2 32.25,61.9 33,61.15 33,54.775 R9.2
Button1_3: R10.2 X8.3 | length 10.9
  Top Layer w0.4: X8.3 34.75,61.5 35.125,61.125 R10.2
Button1_Minus: U4.4 X2.3 | length 21.5
  Top Layer w0.4: X2.3 92.915,48.25 105.766,48.25 106,48.016 U4.4
Button1_Plus: U4.2 X2.4 | length 26.7
  Top Layer w0.4: X2.4 91.375,49.25 107.066,49.25 107.3,49.016 U4.2
Button1_Rev: U4.6 X2.2 | length 16.2
  Top Layer w0.4: X2.2 94.455,47.25 104.466,47.25 104.7,47.016 U4.6
Button2_1: R20.2 X12.1 | length 11.7
  Top Layer w0.4: X12.1 94.75,63.5 97,61.25 97,54.775 R20.2
Button2_2: R19.2 X12.2 | length 12.5
  Top Layer w0.4: X12.2@97.5,65.778 97.508,65.769 97.508,62.742 100.875,59.375 R19.2
Button2_3: R18.2 X12.3 | length 12.8
  Top Layer w0.4: X12.3 99.75,63.25 104.625,58.375 R18.2
Button2_Minus: U4.10 X2.33 | length 35.5
  Top Layer w0.4: X2.33 77.58,35.83 79.65,37.9 105.116,37.9 105.35,37.666 U4.10
Button2_Plus: U4.12 X2.32 | length 39.8
  Top Layer w0.4: X2.32 75.25,30.61 75.25,34.9 79.25,38.9 105.957,38.9 106.65,38.207 U4.12
Button2_Rev: U4.8 X2.1 | length 17.5
  Top Layer w0.4: X2.1 100.285,45.615 101.279,44.621 v1(101.279,43.871) v1@101.279,43.621 ; v1(101.386,36.507) 104.025,36.507 104.05,36.482 U4.8
  Bottom Layer w0.4: v1(101.279,43.871) 101.332,43.818 101.332,36.56 v1(101.386,36.507)
D1O: U2.14 X1.5 | length 27.9
  Top Layer w0.4: U2.14 66.095,17.805 66.75,17.15 80.5,17.15 83.25,14.4 X1.5@83.25,8.9
GND: BT1.2 C1.1 C2.2 C3.1 C4.1 C5.2 C6.2 C11.1 C12.1 C13.1 C14.2 C15.2 C16.1 C17.1 C18.1 C19.2 C20.1 C21.1 D1.2 D2.2 D5.1 D6.2 R7.2 R11.2 R12.2 R13.2 R24.2 R25.2 U1.1 U1.2 U1.3 U1.4 U1.7 U2.15 U3.3 U3.5 U3.6 U3.7 U3.8 U4.7 X1.1 X1.2 X2.19 X2.39 X3.2 X4.2 X5.4 X6.2 X7.4 X8.8 X10.3 X11.3 X12.8 | length 1.6
  Bottom Layer w1: R13.2 57.45,40.075 v1(57.45,38.55)
I2C1_SCL: R3.1 U1.6 X2.14 | length 38.6
  Top Layer w0.5: R3.1 37.105,47.63 39.842,47.63 40.135,47.337 ; U1.6 40.135,47.337 ; X2.14 62.34,50.31 59.5,53.15 44,53.15 40.135,49.285 40.135,47.337
I2C1_SDA: R6.1 U1.5 X2.15 | length 31.1
  Top Layer w0.5: U1.5 41.405,48.805 44.25,51.65 53.75,51.65 ; R6.1 53.75,51.65 ; X2.15 59.8,49.85 58,51.65 53.75,51.65
Motor1_dir: X2.26 X9.2 | length 36.6
  Top Layer w0.4: v1(56,57.15) X9.2
  Bottom Layer w0.4: v1(56,57.15) 56,35.9 59.8,32.1 X2.26
Motor2_dir: X2.27 X13.2 | length 152.7
  Bottom Layer w0.4: X2.27 62.34,32.006 62.984,32.65 72.5,32.65 73.79,31.36 73.79,8.96 79,3.75 122.25,3.75 126.75,8.25 126.75,57.75 121.25,63.25 X13.2
NetBT1_1: BT1.1 X2.21 | length 64.7
  Int2 (PWR) w1.4: X2.21 47.1,27.72 47.92,26.9 107.75,26.9 108.5,26.15
  other v1: 107.75,24.15 110,24.15 107.75,25.9 110,25.9
NetC2_1: C2.1 U2.2 | length 4
  Top Layer w0.5: C2.1@64.81,8.15 C2.1 U2.2
NetC3_2: C3.2 U2.6 | length 4.9
  Top Layer w0.5: U2.6 69.905,10.693 71.341,9.257 71.341,7.991 C3.2
NetC9_1: C9.1 U2.1 | length 7.3
  Top Layer w0.5: C9.1@63.44,4.9 63.525,4.985 63.525,8.946 63.555,8.976 U2.1
NetC9_2: C9.2 U2.3 | length 7.1
  Top Layer w0.5: U2.3 66.095,10.555 66.25,10.4 C9.2@66.25,5.09
NetC10_1: C10.1 U2.4 | length 7.9
  Top Layer w0.5: U2.4 67.365,6.535 67.91,5.99 68.635,5.99 69,5.625 C10.1
NetC10_2: C10.2 U2.5 | length 4.4
  Top Layer w0.5: U2.5 68.635,10.515 69,10.15 C10.2
NetC11_2: C11.2 R8.1 U4.1 | length 111.1
  Top Layer w0.4: C11.2@27.65,52.55 27.575,52.475 27.575,32.175 30.1,29.65 40.25,29.65 43.25,32.65 71.5,32.65 78.5,39.65 106.75,39.65 107.95,40.85 U4.1
  Top Layer w0.8: C11.2@27.65,52.55 R8.1@27.65,54.575
NetC12_2: C12.2 R9.1 U4.3 | length 108.7
  Top Layer w0.4: C12.2 31.45,50.775 28.5,47.825 28.5,32.65 30.5,30.65 40,30.65 43.25,33.9 71,33.9 77.75,40.65 106,40.65 106.65,41.3 U4.3
  Top Layer w0.8: R9.1 31.413,54.613 C12.2@31.413,52.537
NetC13_2: C13.2 R10.1 U4.5 | length 108.7
  Top Layer w0.4: C13.2 36.8,50.05 36.5,49.75 31.5,49.75 30.5,48.75 30.5,32.4 31.25,31.65 39.75,31.65 43.15,35.05 70.65,35.05 77.25,41.65 105.109,41.65 105.402,41.943 105.402,42.357 105.375,42.384 105.375,43.425 U4.5
  Top Layer w0.8: C13.2@36.85,52.55 R10.1@36.85,54.575 ; R10.1 R10.1@36.925,54.6
NetC16_2: C16.2 R18.1 U4.9 | length 40.8
  Top Layer w0.4: U4.9 104.7,33.884 104.934,33.65 114,33.65 115,34.65 115,50.4 113.15,52.25 C16.2@106.3,52.25
  Top Layer w0.6: C16.2 106.337,52.437 106.337,54.612 R18.1
NetC17_2: C17.2 R19.1 U4.11 | length 39.5
  Top Layer w0.4: C17.2 102.55,51.234 102.834,50.95 112.7,50.95 114,49.65 114,35.618 113.032,34.65 106.234,34.65 106,34.884 U4.11
  Top Layer w0.6: C17.2 102.587,52.438 102.587,54.612 R19.1
NetC18_2: C18.2 R20.1 U4.13 | length 28.3
  Top Layer w0.4: C18.2@98.925,52.475 98.716,52.266 98.716,51.284 100,50 108.516,50 108.75,49.766 108.75,39.416 107.734,38.4 107.3,37.966 U4.13
  Top Layer w0.6: C18.2@98.8,52.35 98.837,52.388 98.837,54.613 R20.1
NetD1_1: D1.1 R1.1 | length 1.9
  Top Layer w0.5: D1.1 R1.1
NetD2_1: D2.1 R2.1 | length 2.1
  Top Layer w0.5: D2.1 R2.1
NetD3_1: D3.1 R4.1 | length 6.8
  Top Layer w0.5: R4.1 58.6,25.775 58.925,26.1 58.925,26.607 59.218,26.9 63.307,26.9 63.6,26.607 63.6,26.05 D3.1
NetD4_1: D4.1 R5.1 | length 4.3
  Top Layer w0.5: R5.1@60.437,25.712 R5.1@60.5,25.775 ; R5.1 60.875,25.65 61.957,25.65 62.25,25.357 62.25,24.443 62.543,24.15 D4.1
NetD5_2: D5.2 L1.2 U3.2 | length 2.5
  Top Layer w0.7: U3.2 15.25,17
NetD6_1: D6.1 R21.1 | length 2.1
  Top Layer w0.5: D6.1 25.562,27.688 25.562,25.812 R21.1
NetR14_1: R14.1 X2.11 | length 6.4
  Bottom Layer w0.5: X2.11 69.96,48.11 70.875,49.025 R14.1
NetR15_1: R15.1 X2.12 | length 6.2
  Bottom Layer w0.5: R15.1 67.272,51.503 67.272,45.762 X2.12
NetR16_1: R16.1 X2.13 | length 6.7
  Top Layer w0.5: X2.13@64.878,45.617 X2.13
  Bottom Layer w0.5: R16.1 63.375,49.525 64.88,48.02 X2.13
NetR17_1: R17.1 X2.16 | length 3.3
  Top Layer w0.4: X2.16 X2.16@57.318,45.557
  Bottom Layer w0.5: X2.16 57.318,45.557 57.318,42.457 R17.1
NetR22_2: R22.2 X2.35 | length 6
  Top Layer w0.4: X2.35@82.642,30.418 X2.35
  Bottom Layer w0.4: X2.35 82.66,27.24 83.875,26.025 R22.2
NetR23_2: R23.2 X2.34 | length 5.5
  Top Layer w0.4: X2.34 X2.34@80.122,30.398
  Bottom Layer w0.4: X2.34 80.122,30.398 80.122,24.902 R23.2 R23.2@80.128,24.903
PWM_Motor1: X2.5 X9.1 | length 40.1
  Bottom Layer w0.5: X9.1 53.5,65.025 55.225,63.3 66.813,63.3 83.848,46.265 84.225,46.265 84.875,45.615 X2.5
PWM_Motor2: X2.6 X13.1 | length 54.9
  Top Layer w0.5: X2.6 82.66,51.31 92.75,61.4 92.75,67.357 93.293,67.9 118.457,67.9 118.75,67.607 X13.1@118.75,65.019
R1I: U2.13 X1.4 | length 27.9
  Top Layer w0.4: U2.13 67.365,18.785 68,18.15 81.25,18.15 85.25,14.15 X1.4@85.25,8.9
SPI1_CS: R11.1 R15.2 X8.5 | length 35.2
  Bottom Layer w0.5: X8.5 39.75,62.9 41.9,60.75 60.4,60.75 65.375,55.775 R11.1 R15.2
SPI1_MOSI: R12.1 R16.2 X8.4 | length 34.2
  Bottom Layer w0.5: X8.4 37.25,62.65 40.25,59.65 58,59.65 61.625,56.025 R12.1 R16.2
SPI1_SCK: R7.1 R14.2 X8.6 | length 36
  Bottom Layer w0.5: X8.6 42.25,63.15 42.75,62.65 61.75,62.65 69.125,55.275 R7.1 R14.2
SPI5_CS: R22.1 R24.1 X12.5 | length 122.5
  Bottom Layer w0.5: R22.1 82.25,24.775 82.25,22.65 82.125,22.525 82.125,20.261 83.886,18.5 113,18.5 117,22.5 117,27.5 117,28.75 cw(c117.5,28.75) 117.5,29.25 ccw(c117.5,29.75) 117.5,30.25 116.5,30.25 cw(c116.5,30.75) 116.5,31.25 117.5,31.25 ccw(c117.5,31.75) 117.5,32.25 116.5,32.25 cw(c116.5,32.75) 116.5,33.25 117.5,33.25 ccw(c117.5,33.75) 117.5,34.25 116.5,34.25 cw(c116.5,34.75) 116.5,35.25 117.5,35.25 ccw(c117.5,35.75) 117.5,36.25 116.5,36.25 cw(c116.5,36.75) 116.5,37.25 117.5,37.25 ccw(c117.5,37.75) 117.5,38.25 116.5,38.25 cw(c116.5,38.75) 116.5,39.25 117.5,39.25 ccw(c117.5,39.75) 117.5,40.25 116.5,40.25 cw(c116.5,40.75) 116.5,41.25 117.5,41.25 ccw(c117.5,41.75) 117.5,42.25 116.5,42.25 cw(c116.5,42.75) 116.5,43.25 117.5,43.25 ccw(c117.5,43.75) 117.5,44.25 116.5,44.25 cw(c116.5,44.75) 116.5,45.25 117.5,45.25 ccw(c117.5,45.75) 117.5,46.25 116.5,46.25 cw(c116.5,46.75) 116.5,47.25 117.5,47.25 ccw(c117.5,47.75) 117.5,48.25 116.5,48.25 cw(c116.5,48.75) 116.5,49.25 117.5,49.25 ccw(c117.5,49.75) 117.5,50.25 cw(c117.5,50.75) 117,50.75 117,51 117,51.5 104.762,63.738 104.762,65.388 X12.5
SPI5_MOSI: R13.1 R17.2 X12.4 | length 123.5
  Bottom Layer w0.5: R17.2 R13.1 59.125,37.775 62.5,34.4 96,34.4 98,32.4 98,21.15 99.5,19.65 111.75,19.65 114.5,22.4 114.5,51 102.303,63.197 X12.4@102.303,65.598
SPI5_SCK: R23.1 R25.1 X12.6 | length 122.8
  Bottom Layer w0.5: R25.1 78.375,21.125 91,8.5 118.25,8.5 122,12.25 122,43.75 122,45.5 ccw(c121.5,45.5) 121.5,46 cw(c121.5,46.5) 121.5,47 122.5,47 ccw(c122.5,47.5) 122.5,48 121.5,48 cw(c121.5,48.5) 121.5,49 122.5,49 ccw(c122.5,49.5) 122.5,50 121.5,50 cw(c121.5,50.5) 121.5,51 122.5,51 ccw(c122.5,51.5) 122.5,52 cw(c122.5,52.5) 122,52.5 122,52.75 122,53.288 112.788,62.5 108.25,62.5 107.25,63.5 X12.6
UART1_RX: D4.2 U2.12 X2.7 | length 80.9
  Top Layer w0.4: D4.2 68,24.15 68.635,23.515 U2.12 68.635,19.384 68.869,19.15 74.75,19.15 78.3,22.7 100.5,22.7 101.4,23.6 v1(101.4,31.242)
  Bottom Layer w0.4: X2.7 80.12,40.58 83.05,37.65 96,37.65 101.308,32.342 101.308,31.333 v1(101.4,31.242)
UART1_TX: D3.2 U2.11 X2.10 | length 82.6
  Top Layer w0.4: D3.2 71,25.9 71.5,25.4 ; U2.11 69.905,23.805 71.5,25.4 ; v1(99.9,31.251) 99.9,25.634 99.666,25.4 71.5,25.4
  Bottom Layer w0.4: X2.10 72.5,39.3 75.6,36.2 95.95,36.2 99.885,32.265 99.885,31.265 v1(99.9,31.251)
UART2_RX: X2.29 X7.2 | length 90.1
  Bottom Layer w0.5: X7.2@18.5,65.4 18.5,32.4 27.25,23.65 63.75,23.65 67.42,27.32 X2.29
UART2_TX: X2.28 X7.3 | length 85.3
  Bottom Layer w0.5: X7.3@21,65.4 20.761,65.161 20.761,64.15 20.718,64.107 20.718,32.811 28.379,25.15 63.361,25.15 66,27.789 66,29.28 X2.28
UART6_RX: X2.9 X5.2 | length 23.7
  Top Layer w0.5: X2.9 75.04,51.19 83.25,59.4 X5.2@83.25,65.889
UART6_TX: X2.8 X5.3 | length 23.6
  Top Layer w0.5: X2.8 77.58,50.48 85.75,58.65 X5.3@85.75,65.805
VIN: C5.1 C6.1 U3.1 X1.7 X1.8 X3.1 X4.1 X6.1 X8.7 X12.7 | length 162.2
  Int2 (PWR) w2.5: X6.1@8.23,64.65 8.23,61.614 9.694,60.15 ; v1(9,18.75) v1(9,20.25) ; 9.694,20.25 9.694,60.15 ; X8.7 44.75,61.614 43.286,60.15 ; X4.1 72.71,61.186 73.746,60.15 ; X12.7@109.75,65.75 109.75,61.614 108.286,60.15 73.746,60.15 ; 9.694,60.15 43.286,60.15 ; 43.286,60.15 73.746,60.15
  other v1: 75.25,13.65 77.25,13.65 79.25,13.65 75.25,15.65 77.25,15.65 79.25,15.65 4.5,18.75 6,18.75 7.5,18.75 4.5,20.25 6,20.25 7.5,20.25
pads on no net: U2.7 U2.8 U2.9 U2.10 X1.3 X1.6 X1.M X2.17 X2.20 X2.22 X2.23 X2.24 X2.25 X2.36 X2.37 X2.38

## Polygon pours and split planes (outlines as drawn)
GND on Top Layer "GND_L01_P037" (solid, remove dead copper, pour order 37): 0,70 130,70 130,0 0,0
5V on Top Layer "5V_L01_P034" (solid, pour order 34): 31.25,14 47.5,14 47.5,24 45,24 22.75,24 22.75,22.5 31.25,22.5
NetD5_2 on Top Layer "NETD5_2_L01_P032" (solid, pour order 32): 15.25,17.5 15.5,17.75 26.25,17.75 26.25,10.57 27.82,9 41,9 41,3.25 40.5,3.25 16.75,3.25 16.75,14.5 15.25,16
VIN on Top Layer "VIN_L01_P012" (solid, pour order 12): 2.75,25.5 2.75,18.5 3.5,17.75 20.5,17.75 20.5,25.5
VIN on Top Layer "VIN_L01_P010" (solid, pour order 10): 2.75,28 2.75,21 5.75,21 5.75,27.75 5.5,28
VIN on Top Layer "VIN_L01_P016" (solid, pour order 16): 80.25,6.2 80.25,16.4 74.25,16.4 74.25,8.45 76.5,6.2
NetBT1_1 on Top Layer "NETBT1_1_L01_P024" (solid, pour order 24): 107,31.9 107,23.4 110.75,23.4 110.75,31.9
GND on Bottom Layer "GND_L04_P029" (solid, pour order 29): 0,70 130,70 130,0 0,0
5V on Bottom Layer "5V_L04_P017" (solid, pour order 17): 42,22.65 42,16.65 46.5,16.65 46.5,22.65
GND on Int2 (PWR) "GND_L03_P039" (solid, pour order 39): 0,70 130,70 130,0 0,0
VIN on Int2 (PWR) "VIN_L03_P019" (solid, pour order 19): 7.475,21 7.475,61.4 11,61.4 13,61.4 13,21
VIN on Int2 (PWR) "VIN_L03_P018" (solid, pour order 18): 2.75,21 13,21 13,11.507 15.257,9.233 80.25,8.75 80.25,4.497 79.097,3.347 6.304,3.587 2.75,6.075
VIN on Int2 (PWR) "VIN_L03_P038" (solid, pour order 38): 80.25,8.5 80.25,17.16 74.094,17.16 73.5,16.566 73.5,8.5
NetBT1_1 on Int2 (PWR) "NETBT1_1_L03_P025" (solid, pour order 25): 46.5,27.6 46.6,27.5 46.6,23.4 107,23.4 110.75,23.4 110.75,26.9
5V on Int2 (PWR) "5V_L03_P021" (solid, pour order 21): 41.75,16.4 46,16.4 46,32.4 47.25,33.65 95.25,33.65 95.25,37.65 44.513,37.65 41.939,35.102
NetBT1_1 on Int2 (PWR) "NETBT1_1_L03_P023" (solid, pour order 23): 107,26.9 107,23.4 110.75,23.4 110.75,26.9
VIN on Int2 (PWR) "VIN_L03_P022" (solid, pour order 22): 80.25,15.9 80.25,16.65 74.25,16.65 74.25,15.9
GND on Int1 (GND) "GND_L02_P026" (solid, pour order 26): 0,70 130,70 130,0 0,0

## Keep-outs
Keep-Out Layer:
  the board outline again, w0.15

## Other copper
Top Layer:
  pour cut-out: 33.706,55.825 33.706,61.442 32.956,62.192 33,62.236 33,67 35.75,67 36,66.75 35.831,66.581 35.831,55.825
  pour cut-out: 93.606,67.144 93.506,67.044 93.506,61.4 97.766,61.4 97.809,61.443 99.694,59.558 104.442,59.558 101,63 101,67.25
  pour cut-out: 104.25,33 114.314,33 114,32.686 114,31.5 104.5,31.5 104.25,31.75
  pour cut-out: 44,44.25 96.75,44.25 97.25,43.75 97.25,31.75 44,31.75
  pour cut-out: 80.25,16.4 80.25,6 88.45,6 88.45,16.2 93.75,21.5 100.75,21.5 102.25,23 102.25,32.5 99.25,32.5 99.25,27 97.411,27.089 64.08,27.089 64.08,24.308 65.516,22.871 65.5,22.855 65.5,16.5
Bottom Layer:
  pour cut-out: 85.535,16.882 85.5,16.847 85.5,10 86.563,8.937 123.605,8.937 124.5,9.832 124.5,20 111.728,20 111.478,20.25 100,20.25 100,20 98,18 85.5,18
  pour cut-out: 85.5,11.75 77.25,20 82.25,20 84.625,17.625 84.769,17.769 85.5,17.769
  pour cut-out: 17.061,64.846 17.061,47.813 17.5,47.375 17.5,64.875
  pour cut-out: 113.439,51.268 113.439,51.578 101.5,63.517 101.5,64.75 113.5,64.75 124.25,54 124.25,51.221
  pour cut-out: 111.478,20.25 111.557,20.25 113.439,22.132 113.439,51.268 124.5,51.268 124.5,19.692
  pour cut-out: 17.311,32.189 17.311,26.943 21.793,22.461 41.694,22.461 41.694,22.65 42,22.956 42.09,22.866 46.716,22.866 46.716,23.216 46.632,23.132 27.035,23.132 17.982,32.185
  pour cut-out: 17.311,64.285 17.311,32.189 17.5,32 17.685,32.185 17.982,32.185 17.982,64.232 18,64.25